# Altium PCB PCB_nanopad-retro.pcbdoc
Units mil, origin at the board's own origin, x right, y up, seen from the top; angles counter-clockwise.
Board outline 4460 x 5200 mil, 2 copper layers (Top Layer, Bottom Layer); 68 components, 60 nets, 304 pads, 9 vias.
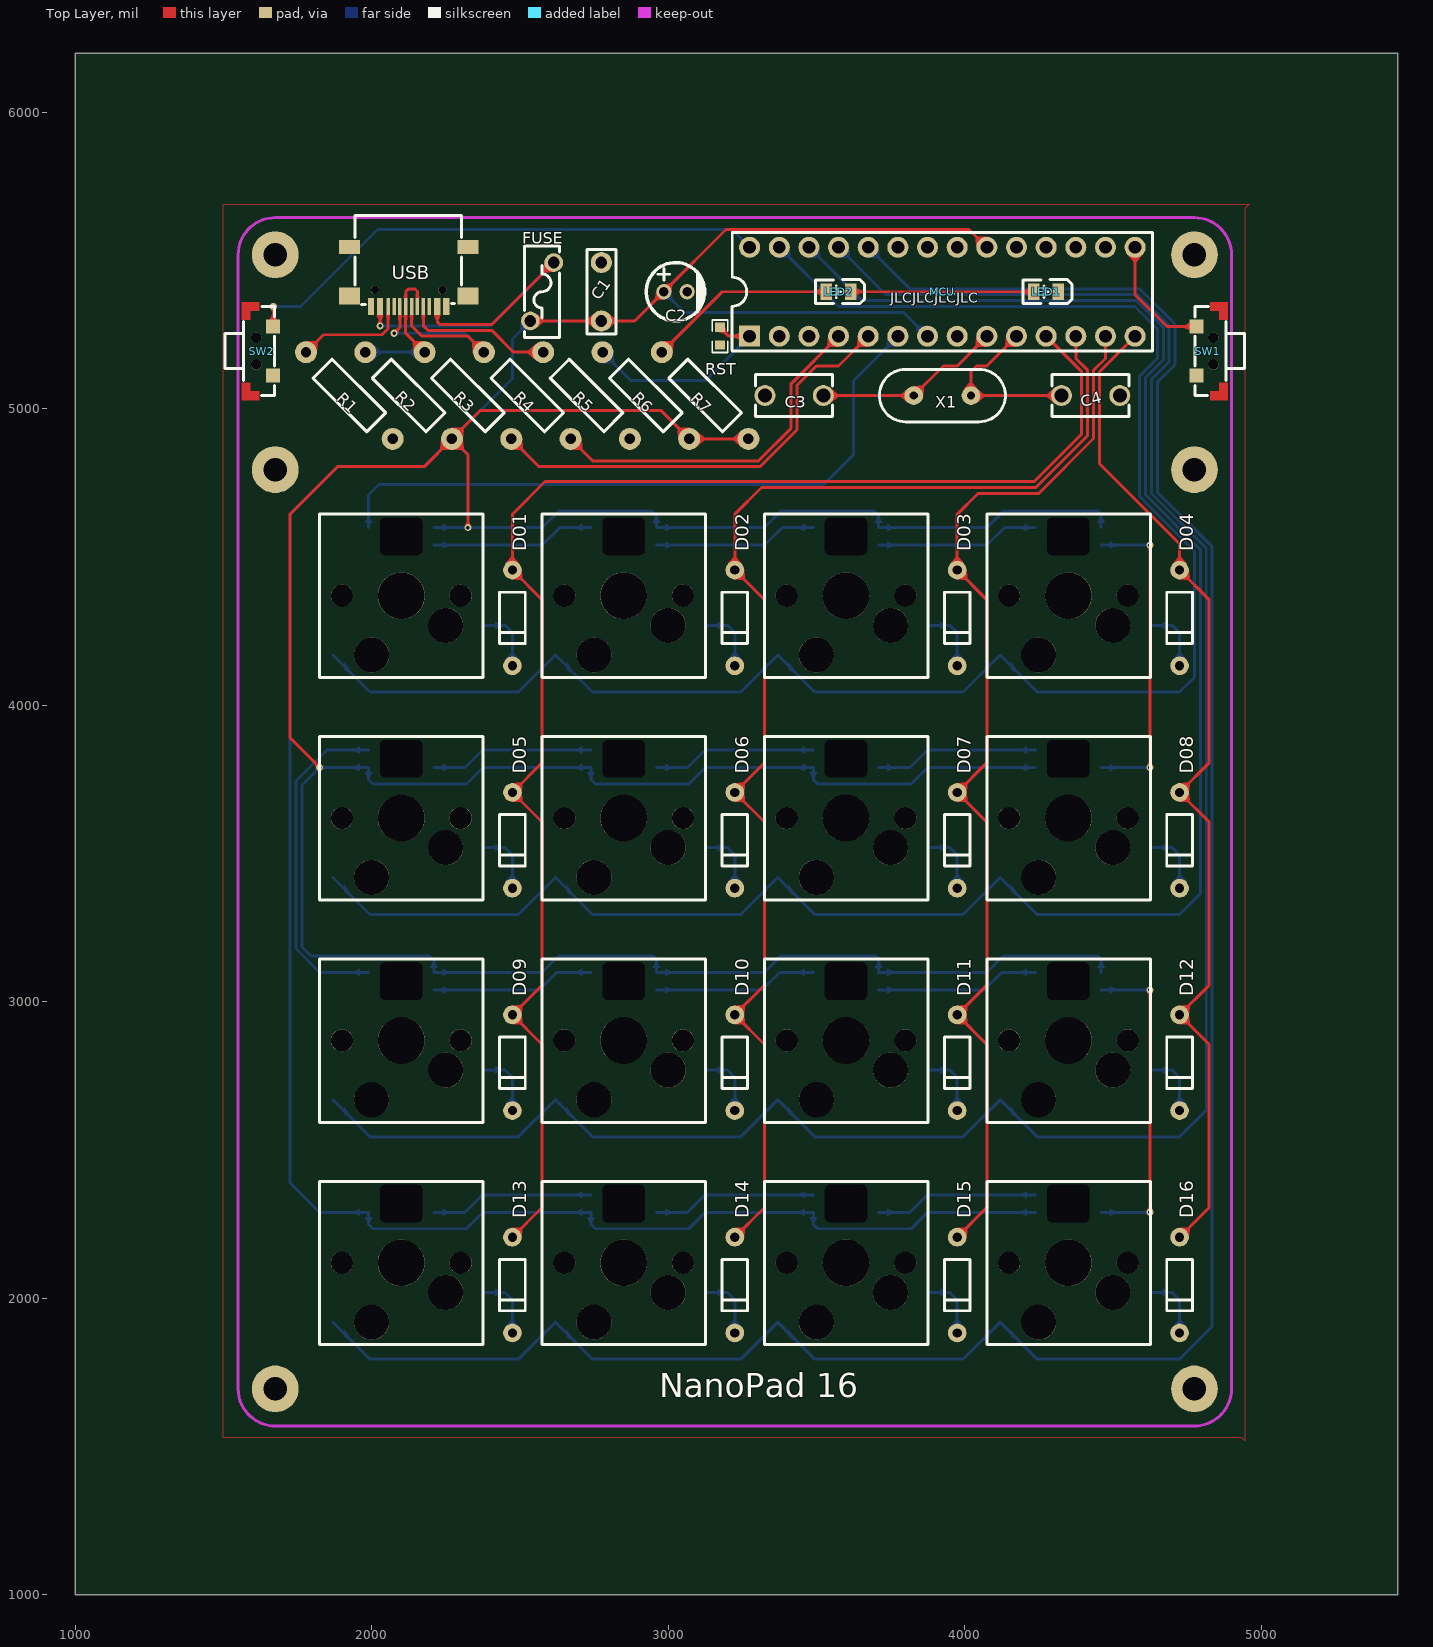
[diagram p0: Top Layer view]
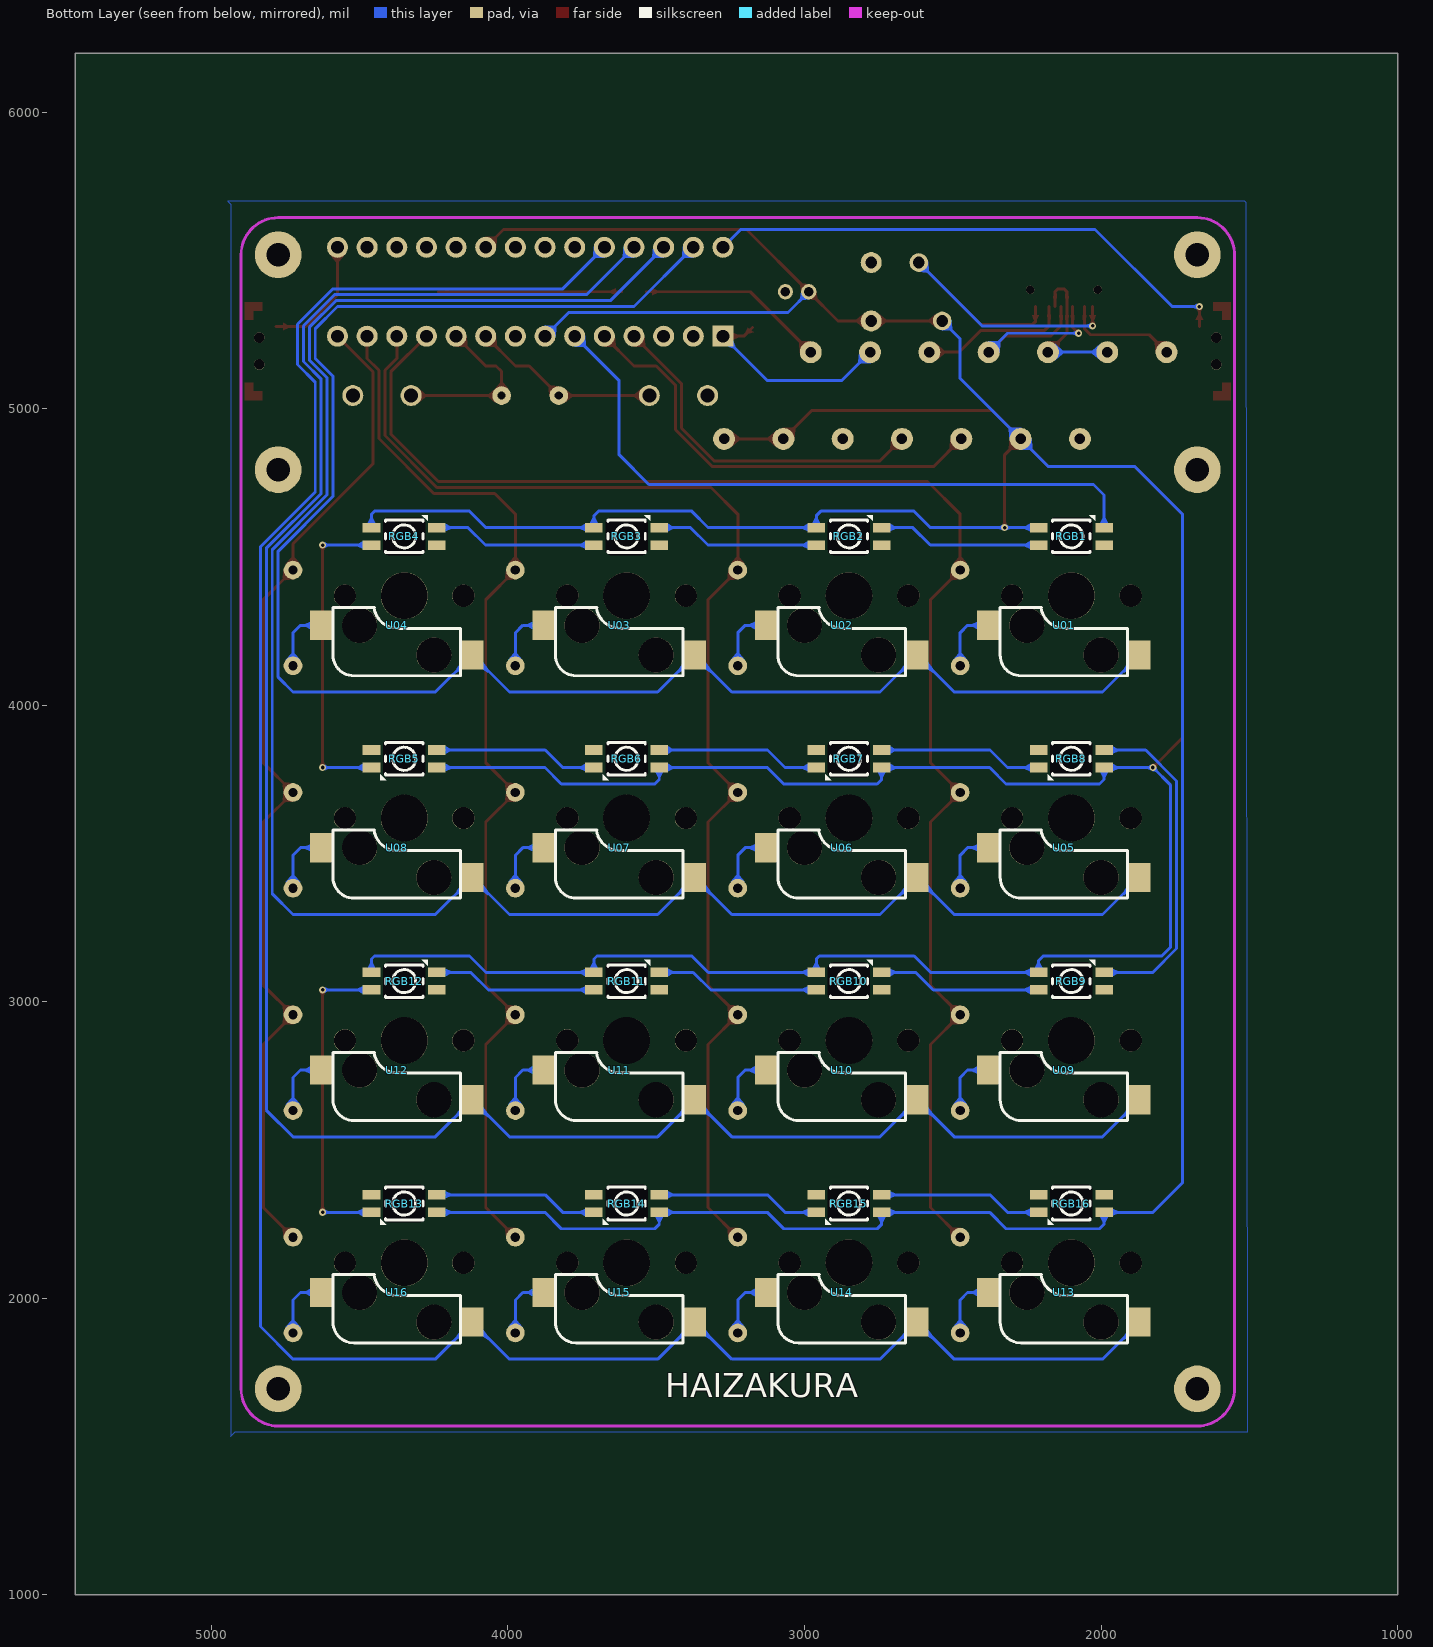
[diagram p1: Bottom Layer view, seen from below]

## Layer stack, top to bottom
Top Layer: signal copper (thickness not stored)
Dielectric: dielectric 12.6, FR-4, Dk 4.8
Bottom Layer: signal copper (thickness not stored)

## Board outline
5460,1000 1000,1000 1000,6200 5460,6200

## Components (designator, comment, footprint, x,y, rotation, side; value= is the part's Value field where it differs from the comment)
C1 "100nF" CAP-TH_L7.2-W2.5-P5.00-D0.6 2775,5395 r270 top
C2 "4.7uF" CAP-TH_BD5.0-P2.00-D0.8-FD 3025,5395 r0 top
C3 "22pF" CAP-TH_L6.5-W3.5-P5.00-D1.2 3425.01,5045 r180 top
C4 "22pF" CAP-TH_L6.5-W3.5-P5.00-D1.2 4425.01,5045 r180 top
D01 "1N4148_C402212" DO-35_BD2.0-L4.2-P8.20-D0.5-RD 2475,4295 r90 top
D02 "1N4148_C402212" DO-35_BD2.0-L4.2-P8.20-D0.5-RD 3225,4295 r90 top
D03 "1N4148_C402212" DO-35_BD2.0-L4.2-P8.20-D0.5-RD 3975,4295 r90 top
D04 "1N4148_C402212" DO-35_BD2.0-L4.2-P8.20-D0.5-RD 4725,4295 r90 top
D05 "1N4148_C402212" DO-35_BD2.0-L4.2-P8.20-D0.5-RD 2475,3545 r90 top
D06 "1N4148_C402212" DO-35_BD2.0-L4.2-P8.20-D0.5-RD 3225,3545 r90 top
D07 "1N4148_C402212" DO-35_BD2.0-L4.2-P8.20-D0.5-RD 3975,3545 r90 top
D08 "1N4148_C402212" DO-35_BD2.0-L4.2-P8.20-D0.5-RD 4725,3545 r90 top
D09 "1N4148_C402212" DO-35_BD2.0-L4.2-P8.20-D0.5-RD 2475,2795 r90 top
D10 "1N4148_C402212" DO-35_BD2.0-L4.2-P8.20-D0.5-RD 3225,2795 r90 top
D11 "1N4148_C402212" DO-35_BD2.0-L4.2-P8.20-D0.5-RD 3975,2795 r90 top
D12 "1N4148_C402212" DO-35_BD2.0-L4.2-P8.20-D0.5-RD 4725,2795 r90 top
D13 "1N4148_C402212" DO-35_BD2.0-L4.2-P8.20-D0.5-RD 2475,2045 r90 top
D14 "1N4148_C402212" DO-35_BD2.0-L4.2-P8.20-D0.5-RD 3225,2045 r90 top
D15 "1N4148_C402212" DO-35_BD2.0-L4.2-P8.20-D0.5-RD 3975,2045 r90 top
D16 "1N4148_C402212" DO-35_BD2.0-L4.2-P8.20-D0.5-RD 4725,2045 r90 top
FUSE "RL06-110" FUSE-TH_L7.8-W3.0-P5.10-D0.5-S2.00 2575,5395 r90 top
LED1 "17-21SURC/S530-A3/TR8" LED0805-R-RD 4275,5395 r180 top
LED2 "17-21SURC/S530-A3/TR8" LED0805-R-RD 3575,5395 r180 top
MCU "DS1009-28AT1NS-0A2" DIP-28_L35.6-W10.2-P2.54-LS7.6-BL-2 3925,5395 r0 top
R1 "5.1kΩ" RES-TH_BD2.3-L6.5-P10.50-D0.5 1925,5045 r135 top
R2 "1.5K" RES-TH_BD2.3-L6.5-P10.50-D0.5 2125,5045 r315 top
R3 "68Ω" RES-TH_BD2.3-L6.5-P10.50-D0.5 2325,5045 r135 top
R4 "68Ω" RES-TH_BD2.3-L6.5-P10.50-D0.5 2525,5045 r135 top
R5 "5.1kΩ" RES-TH_BD2.3-L6.5-P10.50-D0.5 2725,5045 r135 top
R6 "10kΩ" RES-TH_BD2.3-L6.5-P10.50-D0.5 2925,5045 r135 top
R7 "1kΩ" RES-TH_BD2.3-L6.5-P10.50-D0.5 3125,5045 r315 top
RGB1 "YO-WS2812B-3528反贴雾状" LED-SMD_L3.2-W2.8-BR_DY-S352818 2100,4570 r180 bottom
RGB2 "YO-WS2812B-3528反贴雾状" LED-SMD_L3.2-W2.8-BR_DY-S352818 2850,4570 r180 bottom
RGB3 "YO-WS2812B-3528反贴雾状" LED-SMD_L3.2-W2.8-BR_DY-S352818 3600,4570 r180 bottom
RGB4 "YO-WS2812B-3528反贴雾状" LED-SMD_L3.2-W2.8-BR_DY-S352818 4350,4570 r180 bottom
RGB5 "YO-WS2812B-3528反贴雾状" LED-SMD_L3.2-W2.8-BR_DY-S352818 4350,3820 r0 bottom
RGB6 "YO-WS2812B-3528反贴雾状" LED-SMD_L3.2-W2.8-BR_DY-S352818 3600,3820 r0 bottom
RGB7 "YO-WS2812B-3528反贴雾状" LED-SMD_L3.2-W2.8-BR_DY-S352818 2850,3820 r0 bottom
RGB8 "YO-WS2812B-3528反贴雾状" LED-SMD_L3.2-W2.8-BR_DY-S352818 2100,3820 r0 bottom
RGB9 "YO-WS2812B-3528反贴雾状" LED-SMD_L3.2-W2.8-BR_DY-S352818 2100,3070 r180 bottom
RGB10 "YO-WS2812B-3528反贴雾状" LED-SMD_L3.2-W2.8-BR_DY-S352818 2850,3070 r180 bottom
RGB11 "YO-WS2812B-3528反贴雾状" LED-SMD_L3.2-W2.8-BR_DY-S352818 3600,3070 r180 bottom
RGB12 "YO-WS2812B-3528反贴雾状" LED-SMD_L3.2-W2.8-BR_DY-S352818 4350,3070 r180 bottom
RGB13 "YO-WS2812B-3528反贴雾状" LED-SMD_L3.2-W2.8-BR_DY-S352818 4350,2320 r0 bottom
RGB14 "YO-WS2812B-3528反贴雾状" LED-SMD_L3.2-W2.8-BR_DY-S352818 3600,2320 r0 bottom
RGB15 "YO-WS2812B-3528反贴雾状" LED-SMD_L3.2-W2.8-BR_DY-S352818 2850,2320 r0 bottom
RGB16 "YO-WS2812B-3528反贴雾状" LED-SMD_L3.2-W2.8-BR_DY-S352818 2100,2320 r0 bottom
RST "NC" R0603 3175,5245 r90 top
SW1 "TSB001A3512A" SW-SMD_TSB001XXXX 4820,5195 r270 top
SW2 "TSB001A3512A" SW-SMD_TSB001XXXX 1630,5195 r90 top
U01 "热插拔轴座焊接_二极管" 热插拔轴座 2100,4370 r0 top
U02 "热插拔轴座焊接_二极管" 热插拔轴座 2850,4370 r0 top
U03 "热插拔轴座焊接_二极管" 热插拔轴座 3600,4370 r0 top
U04 "热插拔轴座焊接_二极管" 热插拔轴座 4350,4370 r0 top
U05 "热插拔轴座焊接_二极管" 热插拔轴座 2100,3620 r0 top
U06 "热插拔轴座焊接_二极管" 热插拔轴座 2850,3620 r0 top
U07 "热插拔轴座焊接_二极管" 热插拔轴座 3600,3620 r0 top
U08 "热插拔轴座焊接_二极管" 热插拔轴座 4350,3620 r0 top
U09 "热插拔轴座焊接_二极管" 热插拔轴座 2100,2870 r0 top
U10 "热插拔轴座焊接_二极管" 热插拔轴座 2850,2870 r0 top
U11 "热插拔轴座焊接_二极管" 热插拔轴座 3600,2870 r0 top
U12 "热插拔轴座焊接_二极管" 热插拔轴座 4350,2870 r0 top
U13 "热插拔轴座焊接_二极管" 热插拔轴座 2100,2120 r0 top
U14 "热插拔轴座焊接_二极管" 热插拔轴座 2850,2120 r0 top
U15 "热插拔轴座焊接_二极管" 热插拔轴座 3600,2120 r0 top
U16 "热插拔轴座焊接_二极管" 热插拔轴座 4350,2120 r0 top
USB "TYPEC-304S-ACP16" USB-C-SMD_TYPEC-304S-ACP16 2124.95,5445.01 r180 top
X1 "16MHz" OSC-TH_L10.0-W4.5-P5.00 3925,5045 r270 top

## Footprints (in the part's own frame and the unit in brackets; to place one, negate y for a bottom-side part, rotate by r counter-clockwise, add the part's x,y. Pads: shape width x height; smd on the part's side, far side on the other; paste and mask are expansions set on the pad)
CAP-TH_BD5.0-P2.00-D0.8-FD [mm]
  round 1.3 hole 0.8: 1(-1,0) 2(1,0)
  silkscreen extent -2.5,-2.5 2.5,2.5
CAP-TH_L6.5-W3.5-P5.00-D1.2 [mm]
  round 1.8 hole 1.2: 1(-2.5,0) 2(2.5,0)
  silkscreen extent -3.3,-1.8 3.3,1.8
CAP-TH_L7.2-W2.5-P5.00-D0.6 [mm]
  round 1.8 hole 1: 1(-2.499,0) 2(2.499,0)
  silkscreen extent -3.6,-1.25 3.6,1.25
DIP-28_L35.6-W10.2-P2.54-LS7.6-BL-2 [mm]
  rect 1.8x1.8 hole 1.1: 1(-16.51,-3.81)
  round 1.8 hole 1.1: 2(-13.97,-3.81) 3(-11.43,-3.81) 4(-8.89,-3.81) 5(-6.35,-3.81) 6(-3.81,-3.81) 7(-1.27,-3.81) 8(1.27,-3.81) 9(3.81,-3.81) 10(6.35,-3.81) 11(8.89,-3.81) 12(11.43,-3.81) 13(13.97,-3.81) 14(16.51,-3.81) 15(16.51,3.81) 16(13.97,3.81) 17(11.43,3.81) 18(8.89,3.81) 19(6.35,3.81) 20(3.81,3.81) 21(1.27,3.81) 22(-1.27,3.81) 23(-3.81,3.81) 24(-6.35,3.81) 25(-8.89,3.81) 26(-11.43,3.81) 27(-13.97,3.81) 28(-16.51,3.81)
  silkscreen extent -18,-5.08 18,5.08
DO-35_BD2.0-L4.2-P8.20-D0.5-RD [mm]
  round 1.6 hole 0.8: 1(-4.1,0) 2(4.1,0)
  silkscreen extent -2.2,-1.1 2.2,1.1
FUSE-TH_L7.8-W3.0-P5.10-D0.5-S2.00 [mm]
  round 1.6 hole 1: 1(-2.5,1) 2(2.5,-1)
  silkscreen extent -3.9,-1.5 3.9,1.5
LED0805-R-RD [mm]
  rect 1x1.4 smd: 1(1.05,0) 2(-1.05,0)
  silkscreen extent -2.22,-1.04 1.99,1.01
LED-SMD_L3.2-W2.8-BR_DY-S352818 [mm]
  rect 1.5x0.82 smd: 1(-2.8,0.75) 2(-2.8,-0.75) 3(2.8,-0.75) 4(2.8,0.75)
  Multi-Layer board cut-out: -1.8,1.2 -1.746,1.4 -1.6,1.547 -1.4,1.6 -1.4,1.6 -1.4,1.6 -1.4,1.6 1.4,1.6 1.403,1.6 1.406,1.6 1.406,1.6 1.406,1.6 1.604,1.545 1.747,1.398 1.8,1.2 1.8,1.2 1.8,1.2 1.8,1.2 1.8,1.2 1.8,1.2 1.8,1.2 1.8,1.2 1.8,-1.2 1.8,-1.2 1.746,-1.4 1.6,-1.546 1.4,-1.6 1.4,-1.6 1.4,-1.6 -1.4,-1.6 -1.4,-1.6 -1.4,-1.6 -1.6,-1.547 -1.746,-1.4 -1.8,-1.2 -1.8,-1.2 -1.8,-1.2 -1.8,1.2 -1.8,1.2
  Multi-Layer board cut-out: 1.4,1.6 1.413,1.6 1.413,1.6 1.409,1.6 1.406,1.6 1.406,1.6 1.406,1.6 1.406,1.6 1.406,1.6 1.403,1.6 1.4,1.6 1.4,1.6 1.4,1.6
  silkscreen extent -1.6,-1.4 2.03,1.83
OSC-TH_L10.0-W4.5-P5.00 [mm]
  round 1.6 hole 0.7: 1(0,2.45) 2(0,-2.45)
  silkscreen extent -2.25,-5.39 2.25,5.39
R0603 [mil]
  rect 31.75x34.02 smd: 1(-29.65,0) 2(29.65,0)
  silkscreen extent -55,-26 55,26
RES-TH_BD2.3-L6.5-P10.50-D0.5 [mil]
  round 74 hole 35.4: 1(-206.69,0) 2(206.69,0)
  silkscreen extent -128,-45 128,45
SW-SMD_TSB001XXXX [mm]
  rect 1.2x1.2 smd: 1(-2.1,-0.975) 2(2.1,-0.975)
  round 0 smd: 3(-3.45,0.975) 4(3.45,0.975)
  round 0.9 hole 0.9 unplated: ""(-1.15,0.475) ""(1.15,0.475)
  Top Layer region: 2.7,1.725 4.2,1.725 4.2,0.225 3.45,0.225 3.45,0.975 2.7,0.975
  Top Layer region: -2.7,1.725 -4.2,1.725 -4.2,0.225 -3.45,0.225 -3.45,0.975 -2.7,0.975
  silkscreen extent -3.81,-1.09 3.81,3.16
USB-C-SMD_TYPEC-304S-ACP16 [mm]
  rect 1.8x1.45 smd: 13(-5.07,1.632) 14(5.07,1.632)
  rect 1.8x1.2 smd: 15(-5.07,-2.548) 16(5.07,-2.548)
  rect 0.55x1.45 smd: A1B12(-3.225,2.547) A4B9(-2.45,2.547) B1A12(3.22,2.547) B4A9(2.45,2.547)
  rect 0.3x1.45 smd: A5(-1.26,2.532) A6(-0.25,2.547) A7(0.25,2.547) A8(1.25,2.547) B5(1.75,2.547) B6(0.75,2.547) B7(-0.75,2.547) B8(-1.75,2.547)
  round 0.7 hole 0.7 unplated: ""(-2.89,1.102) ""(2.89,1.102)
  silkscreen extent -4.54,-5.26 4.6,2.35
热插拔轴座 [mm]
  rect 1.9x2.5 smd far side: COL(-5.842,-5.08) ROW(7.112,-2.54)
  round 1.905 hole 1.905 unplated: ""(-5.08,0) ""(5.08,0)
  round 3 hole 3 unplated: ""(-2.54,-5.08) ""(3.81,-2.54)
  round 4 hole 4 unplated: ""(0,0)
  silkscreen extent -6.99,-7.01 7.01,6.98

## Free pads (board coordinates)
  round 157.48 hole 78.74: 1(4775,5520) 2(4775,4795) 3(1675,4795) 4(1675,5520) 5(4775,1695) 6(1675,1695)

## Via types
v1: diameter 24, hole 12, Top Layer to Bottom Layer, tented both sides, 9 vias

## Nets (pads, with @x,y where several pads share a name; then routed paths per layer and width w, separated by ;. In a path a pad name is that pad's centre, name@x,y a point inside that pad or via, vN(x,y) a via of type N, cw(c..) or ccw(c..) an arc to the next point about the centre after c; other vN are vias at no path point)
BTN_1: MCU.15 SW1.1 | length 411
  Top Layer w10: MCU.15 4575,5385 4682.3,5277.7 SW1.1
BTN_2: MCU.28 SW2.2 | length 1806.5
  Top Layer w10: SW2.2 v1(1668.39,5345)
  Bottom Layer w10: v1(1668.39,5345) 1760,5345 2020,5605 3215,5605 MCU.28
COL_1: D01.2 D05.2 D09.2 D13.2 MCU.11 | length 5098.7
  Top Layer w10: D13.2 2575,2306.42 2575,2856.42 D09.2 2575,3056.42 2575,3606.42 D05.2 2575,3806.4 2575,4356.4 D01.2 2475,4645 2585,4755 4235,4755 4395,4915 4395,5125 MCU.11
COL_2: D02.2 D06.2 D10.2 D14.2 MCU.12 | length 4338.4
  Top Layer w10: D14.2 3325,2306.42 3325,2856.42 D10.2 3325,3056.42 3325,3606.42 D06.2 3325,3806.42 3325,4356.42 D02.2 3225,4645 3315,4735 4240,4735 4415,4910 4415,5130 4375,5170 MCU.12
COL_3: D03.2 D07.2 D11.2 D15.2 MCU.13 | length 3614.3
  Top Layer w10: D15.2 4075,2306.42 4075,2856.42 D11.2 4075,3056.42 4075,3606.42 D07.2 4075,3806.42 4075,4356.42 D03.2 3975,4645 4045,4715 4250,4715 4435,4900 4435,5130 4475,5170 MCU.13
COL_4: D04.2 D08.2 D12.2 D16.2 MCU.14 | length 3448.7
  Top Layer w10: MCU.14 4455,5125 4455,4815 4725,4545 D04.2 4825,4356.42 4825,3806.42 D08.2 4825,3606.42 4825,3056.42 D12.2 4825,2856.42 4825,2306.42 D16.2
D01_1: D01.1 U01.ROW | length 216.8
  Bottom Layer w10: U01.ROW 2450,4270 2475,4245 D01.1
D02_1: D02.1 U02.ROW | length 216.8
  Bottom Layer w10: U02.ROW 3200,4270 3225,4245 D02.1
D03_1: D03.1 U03.ROW | length 216.8
  Bottom Layer w10: U03.ROW 3950,4270 3975,4245 D03.1
D04_1: D04.1 U04.ROW | length 216.8
  Bottom Layer w10: U04.ROW 4700,4270 4725,4245 D04.1
D05_1: D05.1 U05.ROW | length 216.8
  Bottom Layer w10: U05.ROW 2450,3520 2475,3495 D05.1
D06_1: D06.1 U06.ROW | length 216.8
  Bottom Layer w10: U06.ROW 3200,3520 3225,3495 D06.1
D07_1: D07.1 U07.ROW | length 216.8
  Bottom Layer w10: U07.ROW 3950,3520 3975,3495 D07.1
D08_1: D08.1 U08.ROW | length 216.8
  Bottom Layer w10: U08.ROW 4700,3520 4725,3495 D08.1
D09_1: D09.1 U09.ROW | length 216.8
  Bottom Layer w10: U09.ROW 2450,2770 2475,2745 D09.1
D10_1: D10.1 U10.ROW | length 216.8
  Bottom Layer w10: U10.ROW 3200,2770 3225,2745 D10.1
D11_1: D11.1 U11.ROW | length 216.8
  Bottom Layer w10: U11.ROW 3950,2770 3975,2745 D11.1
D12_1: D12.1 U12.ROW | length 216.8
  Bottom Layer w10: U12.ROW 4700,2770 4725,2745 D12.1
D13_1: D13.1 U13.ROW | length 216.8
  Bottom Layer w10: U13.ROW 2450,2020 2475,1995 D13.1
D14_1: D14.1 U14.ROW | length 216.8
  Bottom Layer w10: U14.ROW 3200,2020 3225,1995 D14.1
D15_1: D15.1 U15.ROW | length 216.8
  Bottom Layer w10: U15.ROW 3950,2020 3975,1995 D15.1
D16_1: D16.1 U16.ROW | length 216.8
  Bottom Layer w10: U16.ROW 4700,2020 4725,1995 D16.1
DN: R2.1 R3.2 USB.A7 USB.B7 | length 528.6
  Top Layer w10: USB.A7 2115.1,5254.9 R3.2@2178.9,5191.1 ; USB.A7@2115.2,5344.7 2115.2,5395.2 2125,5405 2145,5405 2154.5,5395.5 USB.B7
  Bottom Layer w10: R2.1 R3.2
DP: R4.2 USB.A6 USB.B6 | length 772.9
  Top Layer w10: v1(2075.74,5255) 2095.4,5274.7 USB.B6 ; USB.A6 2134.8,5280.2 2170,5245 2325,5245 R4.2@2378.9,5191.1
  Bottom Layer w10: v1(2075.74,5255) 2315,5255 R4.2
GND: C1.1 C2.2 C3.2 C4.1 LED1.2 MCU.8 MCU.22 pad.1 pad.2 pad.3 pad.4 pad.5 pad.6 R1.1 R5.1 RGB1.3 RGB2.3 RGB3.3 RGB4.3 RGB5.3 RGB6.3 RGB7.3 RGB8.3 RGB9.3 RGB10.3 RGB11.3 RGB12.3 RGB13.3 RGB14.3 RGB15.3 RGB16.3 RST.1 SW1.2 SW1.3 SW1.4 SW2.1 SW2.3 SW2.4 USB.13 USB.14 USB.15 USB.16 USB.A1B12 USB.B1A12
LED1_1: LED1.1 LED2.2 | length 617.4
  Top Layer w10: LED2.2@3616.3,5395 LED1.1@4233.7,5395
LED2_1: LED2.1 R7.1 | length 639.4
  Top Layer w10: R7.1@2978.8,5191.1 3182.7,5395 LED2.1@3533.7,5395
RGB2_4: RGB1.2 RGB2.4 | length 554
  Bottom Layer w10: RGB1.2 2575.5,4540.5 2634.5,4599.5 RGB2.4
RGB3_4: RGB2.2 RGB3.4 | length 554
  Bottom Layer w10: RGB2.2 3325.5,4540.5 3384.5,4599.5 RGB3.4
RGB4_4: RGB3.2 RGB4.4 | length 554
  Bottom Layer w10: RGB3.2 4075.5,4540.5 4134.5,4599.5 RGB4.4
RGB5_4: RGB4.2 RGB5.4 | length 1079.6
  Top Layer w10: v1(4625,3790.47) v1(4625,4540.47)
  Bottom Layer w10: RGB5.4 v1(4625,3790.47) ; RGB4.2 v1(4625,4540.47)
RGB6_4: RGB5.2 RGB6.4 | length 554
  Bottom Layer w10: RGB6.4 3815.5,3790.5 3874.5,3849.5 RGB5.2
RGB7_4: RGB6.2 RGB7.4 | length 554
  Bottom Layer w10: RGB7.4 3065.5,3790.5 3124.5,3849.5 RGB6.2
RGB8_4: RGB7.2 RGB8.4 | length 554
  Bottom Layer w10: RGB8.4 2315.5,3790.5 2374.5,3849.5 RGB7.2
RGB9_4: RGB8.2 RGB9.4 | length 1131.2
  Bottom Layer w10: RGB9.4 1825.5,3099.5 1745,3180 1745,3745 1849.5,3849.5 RGB8.2
RGB10_4: RGB9.2 RGB10.4 | length 554
  Bottom Layer w10: RGB9.2 2565.5,3040.5 2624.5,3099.5 RGB10.4
RGB11_4: RGB10.2 RGB11.4 | length 553.7
  Bottom Layer w10: RGB10.2 3315.5,3040.5 3375.5,3099.5 RGB11.4
RGB12_4: RGB11.2 RGB12.4 | length 553.7
  Bottom Layer w10: RGB11.2 4065.5,3040.5 4125.5,3099.5 RGB12.4
RGB13_4: RGB12.2 RGB13.4 | length 1079.6
  Top Layer w10: v1(4625,2290.47) v1(4625,3040.47)
  Bottom Layer w10: RGB13.4 v1(4625,2290.47) ; RGB12.2 v1(4625,3040.47)
RGB14_4: RGB13.2 RGB14.4 | length 554
  Bottom Layer w10: RGB14.4 3815.5,2290.5 3874.5,2349.5 RGB13.2
RGB15_4: RGB14.2 RGB15.4 | length 554
  Bottom Layer w10: RGB15.4 3065.5,2290.5 3124.5,2349.5 RGB14.2
RGB16_4: RGB15.2 RGB16.4 | length 554
  Bottom Layer w10: RGB16.4 2315.5,2290.5 2374.5,2349.5 RGB15.2
RGB_KEY: MCU.6 RGB1.4 | length 2263.6
  Bottom Layer w10: RGB1.4 1989.8,4709.8 2025,4745 3525,4745 3625,4845 3625,5095 MCU.6
ROW_1: MCU.27 U01.COL U02.COL U03.COL U04.COL | length 5953.5
  Bottom Layer w10: U01.COL 1995,4045 2495,4045 U02.COL 2745,4045 3245,4045 U03.COL 3495,4045 3995,4045 U04.COL 4245,4045 4725,4045 4775,4095 4775,4520 4590,4705 4590,5110 4650,5170 4650,5270 4575,5345 3575,5345 MCU.27
ROW_2: MCU.26 U05.COL U06.COL U07.COL U08.COL | length 6634.8
  Bottom Layer w10: U05.COL 1995,3295 2495,3295 U06.COL 2745,3295 3245,3295 U07.COL 3495,3295 3995,3295 U08.COL 4245,3295 4725,3295 4795,3365 4795,4525 4610,4710 4610,5105 4670,5165 4670,5275 4580,5365 3655,5365 MCU.26
ROW_3: MCU.25 U09.COL U10.COL U11.COL U12.COL | length 7316
  Bottom Layer w10: U09.COL 1995,2545 2495,2545 U10.COL 2745,2545 3245,2545 U11.COL 3495,2545 3995,2545 U12.COL 4245,2545 4725,2545 4815,2635 4815,4530 4630,4715 4630,5100 4690,5160 4690,5280 4585,5385 3735,5385 MCU.25
ROW_4: MCU.24 U13.COL U14.COL U15.COL U16.COL | length 7997.2
  Bottom Layer w10: U13.COL 1995,1795 2495,1795 U14.COL 2745,1795 3245,1795 U15.COL 3495,1795 3995,1795 U16.COL 4245,1795 4725,1795 4835,1905 4835,4535 4650,4720 4650,5090 4710,5150 4710,5285 4590,5405 3815,5405 MCU.24
RST: MCU.1 R6.2 RST.2 | length 710.4
  Top Layer w10: RST.2 3204.7,5245 MCU.1
  Bottom Layer w10: R6.2@2778.8,5191.1 2875,5095 3125,5095 MCU.1
S$8506: 
S$8514: 
S$8518: 
S$8522: 
UD+: MCU.4 R4.1 | length 1196.3
  Top Layer w10: R4.1 2745,4825 3305,4825 3415,4935 3415,5085 MCU.4
UD-: MCU.5 R3.1 | length 1512.8
  Top Layer w10: R3.1 2565,4805 3310,4805 3435,4930 3435,5080 3500,5145 3575,5145 MCU.5
USB_A5: R5.2 USB.A5 | length 506.1
  Top Layer w10: USB.A5 2174.6,5280.4 2190,5265 2405,5265 2478.8,5191.1 R5.2@2578.8,5191.1
USB_B5: R1.2 USB.B5 | length 384
  Top Layer w10: R1.2@1778.9,5191.1 1837.7,5250 2035,5250 2056.1,5271.1 USB.B5
VBUS: FUSE.2 USB.A4B9 USB.B4A9 | length 1272.9
  Top Layer w10: v1@2028.5,5280 USB.B4A9 ; USB.A4B9@2221.5,5344.7 2221.5,5293.5 2230,5285 2406,5285 FUSE.2
  Bottom Layer w10: v1@2028.55,5280 2400.96,5280 FUSE.2
  other v1: 2028.55,5280
VCC: C1.2 C2.1 FUSE.1 MCU.7 MCU.20 R2.2 R6.1 R7.2 RGB1.1 RGB2.1 RGB3.1 RGB4.1 RGB5.1 RGB6.1 RGB7.1 RGB8.1 RGB9.1 RGB10.1 RGB11.1 RGB12.1 RGB13.1 RGB14.1 RGB15.1 RGB16.1 | length 20457.6
  Top Layer w10: v1(1825,3790.47) 1725,3890.5 1725,4645 1885,4805 2177.3,4805 R2.2 ; v1(2325,4599.53) 2325,4845 R2.2 ; FUSE.1 C1.2 ; C1.2 2887.23,5296.6 C2.1 ; C2.1 3195.6,5605 4015,5605 MCU.20 ; R7.2 R6.1 2975,4995 2367.3,4995 R2.2
  Bottom Layer w10: RGB1.1 v1(2325,4599.53) 2575,4599.5 2630.5,4655 2945,4655 2960.2,4639.8 RGB2.1 3325,4600 3380,4655 3695,4655 3710.2,4639.8 RGB3.1 4074.5,4599.5 4130,4655 4450,4655 4460.2,4644.8 RGB4.1 ; R2.2@2271.1,4898.9 2177.3,4805 1885,4805 1725,4645 1725,2390 1824.5,2290.5 RGB16.1 1989.8,2250.2 2005,2235 2320,2235 2375.5,2290.5 RGB15.1 2739.8,2250.2 2755,2235 3070,2235 3125.5,2290.5 RGB14.1 3489.8,2250.2 3505,2235 3820,2235 3875.5,2290.5 RGB13.1 ; R2.2 2475,5102.7 2475,5235.93 FUSE.1 ; C2.1 3055.6,5325 3795,5325 MCU.7 ; RGB5.1 3875.5,3790.5 3820,3735 3505,3735 3489.8,3750.2 RGB6.1 3125.5,3790.5 3070,3735 2755,3735 2739.8,3750.2 RGB7.1 2375.5,3790.5 2320,3735 2005,3735 1989.8,3750.2 RGB8.1 v1(1825,3790.47) 1765,3730.5 1765,3185 1795,3155 2195,3155 2210.2,3139.8 RGB9.1 2574.5,3099.5 2630,3155 2950,3155 2960.2,3144.8 RGB10.1 3324.5,3099.5 3380,3155 3700,3155 3710.2,3144.8 RGB11.1 4074.5,3099.5 4130,3155 4450,3155 4460.2,3144.8 RGB12.1
XTAL1: C3.1 MCU.9 X1.2 | length 634.5
  Top Layer w10: C3.1 X1.2 ; X1.2 3928.5,5145 3975,5145 MCU.9
XTAL2: C4.2 MCU.10 X1.1 | length 589.2
  Top Layer w10: X1.1 C4.2 ; X1.1 4021.5,5126.5 4040,5145 4075,5145 MCU.10
pads on no net: MCU.2 MCU.3 MCU.16 MCU.17 MCU.18 MCU.19 MCU.21 MCU.23 RGB16.2 SW1. SW2. U01. U02. U03. U04. U05. U06. U07. U08. U09. U10. U11. U12. U13. U14. U15. U16. USB. USB.A8 USB.B8

## Polygon pours and split planes (outlines as drawn)
GND on Bottom Layer (solid): 1510,5695 1515,5700 4945,5700 4935,5690 4935,1535 4920,1550 1505,1550
GND on Top Layer (solid): 1500,5690 4960,5690 4945,5675 4945,1520 4935,1530 1500,1530

## Keep-outs
Keep-Out Layer:
  lines w10 net S$8506: 1550,1695 ccw(c1675,1695) 1675,1570
  lines w10 net S$8514: 1550,5520 cw(c1675,5520) 1675,5645
  lines w10 net S$8518: 4775,5645 cw(c4775,5520) 4900,5520
  lines w10 net S$8522: 4775,1570 ccw(c4775,1695) 4900,1695

## Other copper
Top Layer:
  region net RST: 3239.57,5232.5 3239.57,5257.5 3224.57,5250 3224.57,5240
  region net RST: 3192,5273.43 3171.73,5258.8 3189.48,5253.11 3197.69,5259.04
  region net VCC: 2798.44,5270.02 2798.44,5323.17 2823.24,5301.6 2823.24,5291.6
  region net VCC: 2960.09,5396.6 2987.23,5369.46 2964.53,5366.83 2957.46,5373.9
  region net VCC: 2751.58,5270.01 2751.55,5323.16 2726.76,5301.57 2726.76,5291.57
  region net VCC: 2556.47,5272.95 2556.47,5320.19 2578.52,5301.57 2578.52,5291.57
  region net VBUS: 2232.24,5316.17 2210.58,5316.17 2216.5,5301.17 2226.5,5301.17
  region net VBUS: 2582.95,5495.39 2616.35,5461.99 2587.59,5459.56 2580.52,5466.64
  region net VBUS: 2039.4,5316.2 2017.7,5316.2 2023.54,5301.2 2033.54,5301.2
  region net VBUS: 2019.54,5287.94 2037.54,5287.94 2033.54,5296.34 2023.54,5296.34
  region net DN: 2109.3,5373.2 2121.1,5373.2 2120.15,5388.2 2110.15,5388.2
  region net DN: 2148.6,5373.2 2160.4,5373.2 2159.52,5388.2 2149.52,5388.2
  region net COL_1: 2498.62,4477.25 2451.38,4477.25 2470,4499.3 2480,4499.3
  region net COL_2: 3248.62,4477.25 3201.38,4477.25 3220,4499.3 3230,4499.3
  region net COL_3: 3998.62,4477.25 3951.38,4477.25 3970,4499.3 3980,4499.3
  region net COL_4: 4748.62,4477.25 4701.38,4477.25 4720,4499.3 4730,4499.3
  region net COL_1: 2473.03,4424.99 2506.43,4458.39 2508.86,4429.64 2501.79,4422.56
  region net COL_1: 2473.03,3737.86 2506.43,3704.45 2508.86,3733.21 2501.79,3740.28
  region net COL_1: 2473.03,2987.86 2506.43,2954.45 2508.86,2983.21 2501.79,2990.28
  region net COL_1: 2473.03,3674.99 2506.43,3708.39 2508.86,3679.64 2501.79,3672.56
  region net COL_1: 2473.03,2237.86 2506.43,2204.45 2508.86,2233.21 2501.79,2240.28
  region net COL_1: 2473.03,2924.99 2506.43,2958.39 2508.86,2929.64 2501.79,2922.56
  region net COL_2: 3223.03,2237.86 3256.43,2204.45 3258.86,2233.21 3251.79,2240.28
  region net COL_2: 3223.03,2924.99 3256.43,2958.39 3258.86,2929.64 3251.79,2922.56
  region net COL_2: 3223.03,2987.86 3256.43,2954.45 3258.86,2983.21 3251.79,2990.28
  region net COL_2: 3223.03,3674.99 3256.43,3708.39 3258.86,3679.64 3251.79,3672.56
  region net COL_2: 3223.03,3737.86 3256.43,3704.45 3258.86,3733.21 3251.79,3740.28
  region net COL_2: 3223.03,4424.99 3256.43,4458.39 3258.86,4429.64 3251.79,4422.56
  region net COL_3: 3973.03,2237.86 4006.43,2204.45 4008.86,2233.21 4001.79,2240.28
  region net COL_3: 3973.03,2924.99 4006.43,2958.39 4008.86,2929.64 4001.79,2922.56
  region net COL_3: 3973.03,2987.86 4006.43,2954.45 4008.86,2983.21 4001.79,2990.28
  region net COL_3: 3973.03,3674.99 4006.43,3708.39 4008.86,3679.64 4001.79,3672.56
  region net COL_3: 3973.03,3737.86 4006.43,3704.45 4008.86,3733.21 4001.79,3740.28
  region net COL_3: 3973.03,4424.99 4006.43,4458.39 4008.86,4429.64 4001.79,4422.56
  region net COL_4: 4723.03,3737.86 4756.43,3704.45 4758.86,3733.21 4751.79,3740.28
  region net COL_4: 4723.03,4424.99 4756.43,4458.39 4758.86,4429.64 4751.79,4422.56
  region net COL_4: 4723.03,2987.86 4756.43,2954.45 4758.86,2983.21 4751.79,2990.28
  region net COL_4: 4723.03,3674.99 4756.43,3708.39 4758.86,3679.64 4751.79,3672.56
  region net COL_4: 4723.03,2237.86 4756.43,2204.45 4758.86,2233.21 4751.79,2240.28
  region net COL_4: 4723.03,2924.99 4756.43,2958.39 4758.86,2929.64 4751.79,2922.56
  region net RGB5_4: 4616,4532.53 4634,4532.53 4630,4524.13 4620,4524.13
  region net RGB5_4: 4616,3798.41 4634,3798.41 4630,3806.81 4620,3806.81
  region net RGB13_4: 4616,3032.53 4634,3032.53 4630,3024.13 4620,3024.13
  region net RGB13_4: 4616,2298.41 4634,2298.41 4630,2306.81 4620,2306.81
  region net XTAL1: 3807.71,5021.38 3807.71,5068.62 3785.66,5050 3785.66,5040
  region net XTAL1: 3546.86,5018.43 3546.86,5071.57 3571.67,5050 3571.67,5040
  region net XTAL2: 4303.15,5018.43 4303.15,5071.57 4278.34,5050 4278.34,5040
  region net XTAL2: 4042.29,5021.38 4042.29,5068.62 4064.34,5050 4064.34,5040
  region net XTAL1: 4039.64,5247.22 4077.22,5209.64 4044.42,5207.35 4037.35,5214.42
  region net XTAL1: 3826.57,5076.43 3859.97,5043.03 3862.4,5071.79 3855.33,5078.86
  region net XTAL2: 4045.08,5065.83 3997.84,5065.83 4016.46,5087.88 4026.46,5087.88
  region net XTAL2: 4139.64,5247.22 4177.22,5209.64 4144.42,5207.35 4137.35,5214.42
  region net LED1_1: 4213.96,5382.5 4213.96,5407.5 4198.96,5400 4198.96,5390
  region net LED1_1: 3636.04,5407.5 3636.04,5382.5 3651.04,5390 3651.04,5400
  region net VCC: 3246.68,4871.1 3246.68,4926.6 3220.78,4903.85 3220.78,4893.85
  region net VCC: 3095.63,4871.1 3095.63,4926.6 3121.53,4903.85 3121.53,4893.85
  region net UD-: 3639.64,5247.22 3677.22,5209.64 3644.42,5207.35 3637.35,5214.42
  region net UD-: 2468.83,4861.92 2508.08,4901.17 2510.3,4866.77 2503.23,4859.7
  region net VCC: 2316,4607.47 2334,4607.47 2330,4615.87 2320,4615.87
  region net VCC: 2268.83,4861.92 2308.08,4901.17 2310.3,4866.77 2303.23,4859.7
  region net VCC: 1825.77,3802.45 1813.02,3789.73 1809.92,3798.51 1817,3805.57
  region net VCC: 2234.22,4901.17 2273.47,4861.92 2239.07,4859.7 2232,4866.77
  region net VCC: 2268.83,4935.78 2308.08,4896.53 2310.3,4930.93 2303.23,4938
  region net VCC: 3034.22,4896.53 3073.47,4935.78 3039.07,4938 3032,4930.93
  region net USB_B5: 1776.53,5228.08 1815.78,5188.83 1818,5223.23 1810.93,5230.3
  region net USB_B5: 2061.97,5316.17 2050.15,5316.17 2051.1,5301.17 2061.1,5301.17
  region net DP: 2087.72,5254.25 2074.99,5266.98 2083.76,5270.09 2090.83,5263.02
  region net DP: 2101.34,5316.17 2089.52,5316.17 2090.43,5301.17 2100.43,5301.17
  region net UD+: 2668.83,4861.92 2708.08,4901.17 2710.31,4866.77 2703.24,4859.69
  region net UD+: 3539.64,5247.22 3577.22,5209.64 3544.42,5207.35 3537.35,5214.42
  region net USB_A5: 2554.37,5163.4 2554.37,5218.9 2528.47,5196.15 2528.47,5186.15
  region net USB_A5: 2180.5,5316.8 2168.7,5316.8 2169.6,5301.8 2179.6,5301.8
  region net DN: 2141.92,5188.83 2181.17,5228.08 2146.77,5230.3 2139.7,5223.23
  region net DN: 2121,5316.2 2109.2,5316.2 2110.1,5301.2 2120.1,5301.2
  region net LED2_1: 2976.53,5228.08 3015.78,5188.83 3018,5223.23 3010.93,5230.3
  region net LED2_1: 3513.96,5382.5 3513.96,5407.5 3498.96,5400 3498.96,5390
  region net VCC: 4039.64,5542.78 4077.22,5580.36 4044.42,5582.65 4037.35,5575.58
  region net VCC: 2984.03,5420.54 3011.17,5393.4 3013.8,5416.1 3006.73,5423.17
  region net BTN_2: 1659.38,5337.06 1677.38,5337.06 1673.38,5328.66 1663.38,5328.66
  region net BTN_2: 1655.88,5301.3 1680.88,5301.3 1673.38,5316.3 1663.38,5316.3
  region net BTN_1: 4601.57,5521.56 4548.43,5521.56 4570,5496.76 4580,5496.76
  region net BTN_1: 4758,5265.18 4758,5290.18 4743,5282.68 4743,5272.68
  region net DP: 2341.92,5188.83 2381.17,5228.08 2346.77,5230.3 2339.7,5223.23
  region net DP: 2140.7,5316.2 2128.9,5316.2 2129.8,5301.2 2139.8,5301.2
Bottom Layer:
  region net VCC: 2984.03,5369.46 3011.17,5396.6 3013.8,5373.9 3006.73,5366.83
  region net VCC: 3839.64,5242.78 3877.22,5280.36 3844.42,5282.65 3837.35,5275.58
  region net VBUS: 2582.95,5495.39 2616.35,5461.99 2587.59,5459.56 2580.52,5466.64
  region net VBUS: 2036.49,5271 2036.49,5289 2044.89,5285 2044.89,5275
  region net D16_1: 4748.62,1904.41 4701.38,1904.41 4720,1926.46 4730,1926.46
  region net D16_1: 4667.4,2032.5 4667.4,2007.5 4682.4,2015 4682.4,2025
  region net D01_1: 2498.62,4154.41 2451.38,4154.41 2470,4176.46 2480,4176.46
  region net D01_1: 2417.4,4282.5 2417.4,4257.5 2432.4,4265 2432.4,4275
  region net D02_1: 3248.62,4154.41 3201.38,4154.41 3220,4176.46 3230,4176.46
  region net D02_1: 3167.4,4282.5 3167.4,4257.5 3182.4,4265 3182.4,4275
  region net D03_1: 3917.4,4282.5 3917.4,4257.5 3932.4,4265 3932.4,4275
  region net D03_1: 3998.62,4154.41 3951.38,4154.41 3970,4176.46 3980,4176.46
  region net D04_1: 4667.4,4282.5 4667.4,4257.5 4682.4,4265 4682.4,4275
  region net D04_1: 4748.62,4154.41 4701.38,4154.41 4720,4176.46 4730,4176.46
  region net ROW_1: 1907.4,4145.1 1907.4,4120.79 1922.4,4110.53 1922.4,4124.67
  region net ROW_1: 2582.59,4120.79 2582.59,4145.09 2567.59,4124.66 2567.59,4110.52
  region net ROW_1: 2657.4,4145.1 2657.4,4120.79 2672.4,4110.53 2672.4,4124.67
  region net ROW_1: 3332.59,4120.79 3332.59,4145.09 3317.59,4124.66 3317.59,4110.52
  region net ROW_1: 3407.4,4145.1 3407.4,4120.79 3422.4,4110.53 3422.4,4124.67
  region net ROW_1: 4082.59,4120.79 4082.59,4145.09 4067.59,4124.66 4067.59,4110.52
  region net D05_1: 2417.4,3532.5 2417.4,3507.5 2432.4,3515 2432.4,3525
  region net D05_1: 2498.62,3404.41 2451.38,3404.41 2470,3426.46 2480,3426.46
  region net D06_1: 3167.4,3532.5 3167.4,3507.5 3182.4,3515 3182.4,3525
  region net D06_1: 3248.62,3404.41 3201.38,3404.41 3220,3426.46 3230,3426.46
  region net D07_1: 3917.4,3532.5 3917.4,3507.5 3932.4,3515 3932.4,3525
  region net D07_1: 3998.62,3404.41 3951.38,3404.41 3970,3426.46 3980,3426.46
  region net D08_1: 4667.4,3532.5 4667.4,3507.5 4682.4,3515 4682.4,3525
  region net D08_1: 4748.62,3404.41 4701.38,3404.41 4720,3426.46 4730,3426.46
  region net D09_1: 2498.62,2654.41 2451.38,2654.41 2470,2676.46 2480,2676.46
  region net D09_1: 2417.4,2782.5 2417.4,2757.5 2432.4,2765 2432.4,2775
  region net D10_1: 3167.4,2782.5 3167.4,2757.5 3182.4,2765 3182.4,2775
  region net D10_1: 3248.62,2654.41 3201.38,2654.41 3220,2676.46 3230,2676.46
  region net D11_1: 3917.4,2782.5 3917.4,2757.5 3932.4,2765 3932.4,2775
  region net D11_1: 3998.62,2654.41 3951.38,2654.41 3970,2676.46 3980,2676.46
  region net D12_1: 4667.4,2782.5 4667.4,2757.5 4682.4,2765 4682.4,2775
  region net D12_1: 4748.62,2654.41 4701.38,2654.41 4720,2676.46 4730,2676.46
  region net D13_1: 2498.62,1904.41 2451.38,1904.41 2470,1926.46 2480,1926.46
  region net D13_1: 2417.4,2032.5 2417.4,2007.5 2432.4,2015 2432.4,2025
  region net D14_1: 3167.4,2032.5 3167.4,2007.5 3182.4,2015 3182.4,2025
  region net D14_1: 3248.62,1904.41 3201.38,1904.41 3220,1926.46 3230,1926.46
  region net D15_1: 3917.4,2032.5 3917.4,2007.5 3932.4,2015 3932.4,2025
  region net D15_1: 3998.62,1904.41 3951.38,1904.41 3970,1926.46 3980,1926.46
  region net ROW_4: 1907.4,1895.1 1907.4,1870.79 1922.4,1860.53 1922.4,1874.67
  region net ROW_4: 2582.59,1870.79 2582.59,1895.09 2567.59,1874.66 2567.59,1860.52
  region net ROW_4: 2657.4,1895.1 2657.4,1870.79 2672.4,1860.53 2672.4,1874.67
  region net ROW_4: 3332.59,1870.79 3332.59,1895.09 3317.59,1874.66 3317.59,1860.52
  region net ROW_4: 3407.4,1895.1 3407.4,1870.79 3422.4,1860.53 3422.4,1874.67
  region net ROW_4: 4082.59,1870.79 4082.59,1895.09 4067.59,1874.66 4067.59,1860.52
  region net ROW_3: 1907.4,2645.1 1907.4,2620.79 1922.4,2610.53 1922.4,2624.67
  region net ROW_3: 2582.59,2620.79 2582.59,2645.09 2567.59,2624.66 2567.59,2610.52
  region net ROW_3: 2657.4,2645.1 2657.4,2620.79 2672.4,2610.53 2672.4,2624.67
  region net ROW_3: 3332.59,2620.79 3332.59,2645.09 3317.59,2624.66 3317.59,2610.52
  region net ROW_3: 3407.4,2645.1 3407.4,2620.79 3422.4,2610.53 3422.4,2624.67
  region net ROW_3: 4082.59,2620.79 4082.59,2645.09 4067.59,2624.66 4067.59,2610.52
  region net ROW_2: 1907.4,3395.1 1907.4,3370.79 1922.4,3360.53 1922.4,3374.67
  region net ROW_2: 2582.59,3370.79 2582.59,3395.09 2567.59,3374.66 2567.59,3360.52
  region net ROW_2: 2657.4,3395.1 2657.4,3370.79 2672.4,3360.53 2672.4,3374.67
  region net ROW_2: 3332.59,3370.79 3332.59,3395.09 3317.59,3374.66 3317.59,3360.52
  region net ROW_2: 3407.4,3395.1 3407.4,3370.79 3422.4,3360.53 3422.4,3374.67
  region net ROW_2: 4082.59,3370.79 4082.59,3395.09 4067.59,3374.66 4067.59,3360.52
  region net RGB5_4: 4617.06,4531.47 4617.06,4549.47 4608.66,4545.47 4608.66,4535.47
  region net RGB5_4: 4489.77,4527.97 4489.77,4552.97 4504.77,4545.47 4504.77,4535.47
  region net RGB5_4: 4489.77,3777.97 4489.77,3802.97 4504.77,3795.47 4504.77,3785.47
  region net RGB5_4: 4617.06,3781.47 4617.06,3799.47 4608.66,3795.47 4608.66,3785.47
  region net RGB10_4: 2239.76,3027.97 2239.76,3052.97 2254.76,3045.47 2254.76,3035.47
  region net RGB10_4: 2710.23,3112.03 2710.23,3087.03 2695.23,3094.53 2695.23,3104.53
  region net RGB11_4: 2989.77,3027.97 2989.77,3052.97 3004.77,3045.47 3004.77,3035.47
  region net RGB11_4: 3460.23,3112.03 3460.23,3087.03 3445.23,3094.53 3445.23,3104.53
  region net RGB12_4: 3739.77,3027.97 3739.77,3052.97 3754.77,3045.47 3754.77,3035.47
  region net RGB12_4: 4210.23,3112.03 4210.23,3087.03 4195.23,3094.53 4195.23,3104.53
  region net RGB13_4: 4617.06,3031.47 4617.06,3049.47 4608.66,3045.47 4608.66,3035.47
  region net RGB13_4: 4489.77,3027.97 4489.77,3052.97 4504.77,3045.47 4504.77,3035.47
  region net RGB13_4: 4617.06,2281.47 4617.06,2299.47 4608.66,2295.47 4608.66,2285.47
  region net RGB13_4: 4489.77,2277.97 4489.77,2302.97 4504.77,2295.47 4504.77,2285.47
  region net RGB15_4: 2989.77,2277.97 2989.77,2302.97 3004.77,2295.47 3004.77,2285.47
  region net RGB15_4: 3460.23,2362.03 3460.23,2337.03 3445.23,2344.53 3445.23,2354.53
  region net VCC: 2727.26,2274.33 2752.26,2274.33 2744.76,2259.33 2734.76,2259.33
  region net VCC: 3460.23,2302.97 3460.23,2277.97 3445.23,2285.47 3445.23,2295.47
  region net RGB16_4: 2239.76,2277.97 2239.76,2302.97 2254.76,2295.47 2254.76,2285.47
  region net RGB16_4: 2710.23,2362.03 2710.23,2337.03 2695.23,2344.53 2695.23,2354.53
  region net VCC: 1977.26,2274.33 2002.26,2274.33 1994.76,2259.33 1984.76,2259.33
  region net VCC: 2710.23,2302.97 2710.23,2277.97 2695.23,2285.47 2695.23,2295.47
  region net RGB14_4: 3739.77,2277.97 3739.77,2302.97 3754.77,2295.47 3754.77,2285.47
  region net RGB14_4: 4210.23,2362.03 4210.23,2337.03 4195.23,2344.53 4195.23,2354.53
  region net VCC: 3477.26,2274.33 3502.26,2274.33 3494.76,2259.33 3484.76,2259.33
  region net VCC: 4210.23,2302.97 4210.23,2277.97 4195.23,2285.47 4195.23,2295.47
  region net VCC: 2989.77,3087.03 2989.77,3112.03 3004.77,3104.53 3004.77,3094.53
  region net VCC: 3722.74,3115.67 3697.74,3115.67 3705.24,3130.67 3715.24,3130.67
  region net VCC: 2239.76,3087.03 2239.76,3112.03 2254.76,3104.53 2254.76,3094.53
  region net VCC: 2972.74,3115.67 2947.74,3115.67 2955.24,3130.67 2965.24,3130.67
  region net VCC: 3739.77,3087.03 3739.77,3112.03 3754.77,3104.53 3754.77,3094.53
  region net VCC: 4472.74,3115.67 4447.74,3115.67 4455.24,3130.67 4465.24,3130.67
  region net RGB8_4: 2239.76,3777.97 2239.76,3802.97 2254.76,3795.47 2254.76,3785.47
  region net RGB8_4: 2710.23,3862.03 2710.23,3837.03 2695.23,3844.53 2695.23,3854.53
  region net VCC: 1977.3,3774.33 2002.3,3774.33 1994.8,3759.33 1984.8,3759.33
  region net VCC: 2710.23,3802.97 2710.23,3777.97 2695.23,3785.47 2695.23,3795.47
  region net RGB7_4: 2989.77,3777.97 2989.77,3802.97 3004.77,3795.47 3004.77,3785.47
  region net RGB7_4: 3460.23,3862.03 3460.23,3837.03 3445.23,3844.53 3445.23,3854.53
  region net VCC: 2727.3,3774.33 2752.3,3774.33 2744.8,3759.33 2734.8,3759.33
  region net VCC: 3460.23,3802.97 3460.23,3777.97 3445.23,3785.47 3445.23,3795.47
  region net RGB6_4: 3739.77,3777.97 3739.77,3802.97 3754.77,3795.47 3754.77,3785.47
  region net RGB6_4: 4210.23,3862.03 4210.23,3837.03 4195.23,3844.53 4195.23,3854.53
  region net VCC: 3477.3,3774.33 3502.3,3774.33 3494.8,3759.33 3484.8,3759.33
  region net VCC: 4210.23,3802.97 4210.23,3777.97 4195.23,3785.47 4195.23,3795.47
  region net VCC: 3739.77,4587.03 3739.77,4612.03 3754.77,4604.53 3754.77,4594.53
  region net VCC: 4472.74,4615.67 4447.74,4615.67 4455.24,4630.67 4465.24,4630.67
  region net RGB4_4: 3739.77,4527.97 3739.77,4552.97 3754.77,4545.47 3754.77,4535.47
  region net RGB4_4: 4210.23,4612.03 4210.23,4587.03 4195.23,4594.53 4195.23,4604.53
  region net RGB3_4: 2989.77,4527.97 2989.77,4552.97 3004.77,4545.47 3004.77,4535.47
  region net RGB3_4: 3460.23,4612.03 3460.23,4587.03 3445.23,4594.53 3445.23,4604.53
  region net VCC: 2989.77,4587.07 2989.77,4612.07 3004.77,4604.59 3004.77,4594.59
  region net VCC: 3722.74,4615.67 3697.74,4615.67 3705.24,4630.67 3715.24,4630.67
  region net RGB2_4: 2239.76,4527.97 2239.76,4552.97 2254.76,4545.47 2254.76,4535.47
  region net RGB2_4: 2710.23,4612.03 2710.23,4587.03 2695.23,4594.53 2695.23,4604.53
  region net VCC: 1960.24,3802.97 1960.24,3777.97 1945.24,3785.47 1945.24,3795.47
  region net VCC: 1832.94,3781.47 1832.94,3799.47 1841.34,3795.47 1841.34,3785.47
  region net RGB_KEY: 3739.64,5247.22 3777.22,5209.64 3744.42,5207.35 3737.35,5214.42
  region net VCC: 1825.75,3778.49 1813.02,3791.22 1809.91,3782.45 1816.98,3775.38
  region net VCC: 2222.74,3115.67 2197.74,3115.67 2205.24,3130.67 2215.24,3130.67
  region net RGB_KEY: 2002.26,4615.67 1977.26,4615.67 1984.76,4630.67 1994.76,4630.67
  region net VCC: 2317.06,4590.53 2317.06,4608.53 2308.66,4604.53 2308.66,4594.53
  region net VCC: 2239.8,4587.03 2239.8,4612.03 2254.8,4604.53 2254.8,4594.53
  region net VCC: 2332.94,4590.53 2332.94,4608.53 2341.34,4604.53 2341.34,4594.53
  region net VCC: 2972.74,4615.67 2947.74,4615.67 2955.24,4630.67 2965.24,4630.67
  region net RGB9_4: 1960.24,3862 1960.24,3837 1945.24,3844.5 1945.24,3854.5
  region net RGB9_4: 1960.24,3112 1960.24,3087 1945.24,3094.5 1945.24,3104.5
  region net ROW_4: 4157.4,1895.1 4157.4,1870.79 4172.4,1860.53 4172.4,1874.67
  region net ROW_4: 3672.78,5509.64 3710.36,5547.22 3712.65,5514.42 3705.58,5507.35
  region net ROW_3: 4157.4,2645.1 4157.4,2620.79 4172.4,2610.53 4172.4,2624.67
  region net ROW_3: 3572.78,5509.64 3610.36,5547.22 3612.65,5514.42 3605.58,5507.35
  region net ROW_2: 3472.78,5509.64 3510.36,5547.22 3512.65,5514.42 3505.58,5507.35
  region net ROW_2: 4157.4,3395.1 4157.4,3370.79 4172.4,3360.53 4172.4,3374.67
  region net ROW_1: 4157.4,4145.1 4157.4,4120.79 4172.4,4110.53 4172.4,4124.67
  region net ROW_1: 3372.78,5509.64 3410.36,5547.22 3412.65,5514.42 3405.58,5507.35
  region net DN: 2154.38,5163.4 2154.38,5218.9 2128.48,5196.15 2128.48,5186.15
  region net DN: 2003.32,5163.4 2003.32,5218.9 2029.22,5196.15 2029.22,5186.15
  region net VCC: 2234.22,4901.17 2273.47,4861.92 2239.07,4859.7 2232,4866.77
  region net VCC: 1960.24,2303 1960.24,2278 1945.24,2285.5 1945.24,2295.5
  region net VCC: 2504.21,5298.54 2537.61,5265.14 2508.85,5262.71 2501.78,5269.78
  region net VCC: 2268.83,4935.78 2308.08,4896.53 2310.3,4930.93 2303.23,4938
  region net DP: 2083.68,5246 2083.68,5264 2092.08,5260 2092.08,5250
  region net DP: 2341.92,5188.83 2381.17,5228.08 2346.77,5230.3 2339.7,5223.23
  region net BTN_2: 1676.32,5336 1676.32,5354 1684.72,5350 1684.72,5340
  region net RST: 2776.53,5154.22 2815.78,5193.47 2818,5159.07 2810.93,5152
  region net RST: 3257.25,5209.57 3239.57,5227.24 3234.26,5211.33 3241.34,5204.26

## Silkscreen, mask and mechanical layers (free items; w line width, h text height)
Top Overlay:
  text "JLCJLCJLCJLC" at 3750,5357.5 h35
  text "NanoPad 16" at 2970,1640 h140
Bottom Overlay:
  text "HAIZAKURA" at 3470,1640 h140